# EAGLE board 24V_to_5V_500mA_switching_regulator (EAGLE 8.5.0)
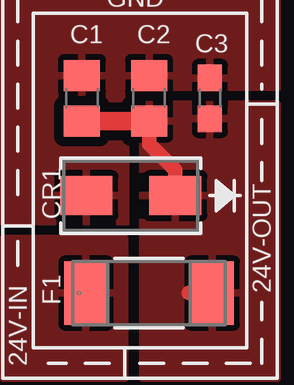
[diagram p0: board, top side]

No outline drawn. Coordinates in mm, seen from the top.
Copper layers (1*16): Top 0.035559375mm / dielectric 1.6mm / Bottom 0.035559375mm
Design rules "openag-router": minimum track width 6mil, minimum drill 10mil, track to track 16mil, track to pad 16mil, pad to pad 16mil, via to via 16mil, smd to smd 16mil, copper to edge 15mil, drill to drill 6mil, minimum pad ring 5mil, minimum via ring 5mil, stop-mask expansion 2.5mil, vias tented up to drill 20mil, thermal gap 10mil

## Footprints (pad centres in the part's own frame; a part is rotated, then mirrored left to right if it is on the bottom)
C0805 = smd 1.3 x 1.5: 1 -0.95,0; 2 0.95,0
C0603 = smd 1.1 x 1: 1 -0.85,0; 2 0.85,0
SMA = smd 2.18 x 1.63: 1 -1.857,0; 2 1.857,0
SS = smd 1.803 x 2.642: 1 -2.629,0; 2 2.629,0

## Placement (x,y rotation side)
C1  10uF  [C0805]  3.3,11.68 90 top
C2  4.7uF  [C0805]  6.1,11.68 90 top
C3  0.1uF  [C0603]  8.64,11.68 90 top
CR1  SMAJ26A-13-F  [SMA]  5.33,7.62 180 top
F1  SST 7  [SS]  6.1,3.56 0 top
U$2  [OPENAG-LOGO-750-MIL]  -3.17,43.18 90 top

## Library data of the parts
C1-C3 = openag-capacitors; POPULATE: YES; VERIFIED: NO
CR1 = openag-diodes; POPULATE: YES; VERIFIED: NO
F1 = openag-fuses; POPULATE: YES; VERIFIED: NO
U$2 = openag-frames

## Nets
24V_IN: F1.1
+24V: C1.1 C2.1 C3.1 CR1.1 F1.2
GND: C1.2 C2.2 C3.2 CR1.2

## Tracks (layer width: path | path; a pad name or v marks a point on that pad's centre or on a via)
24V_IN
  pour Top (isolate 0.406): 0,0 5.08,0 5.08,5.84 0,5.84
+24V
  Top 0.61: C2.1 6.1,9.78 7.19,8.68 CR1.1 | 7.75,3.56 F1.2
  Top 0.762: C1.1 C2.1
  pour Top (isolate 0.406): 11.43,11.43 5.84,11.43 5.84,0 11.43,0
GND
  pour Top (isolate 0.406, rank 2): 11.43,16.51 0,16.51 0,-0.25 11.43,-0.25

## Text on the board
tPlace: GND | 24V-OUT | 24V-IN